# Altium PCB PCB1.PcbDoc (part 1 of 2)
Units mm, origin at the board's own origin, x right, y up, seen from the top; angles counter-clockwise.
Board outline 50 x 65 mm, 2 copper layers (Top Layer, Bottom Layer), stack 1.671 mm thick; 71 components, 49 nets, 263 pads, 156 vias.
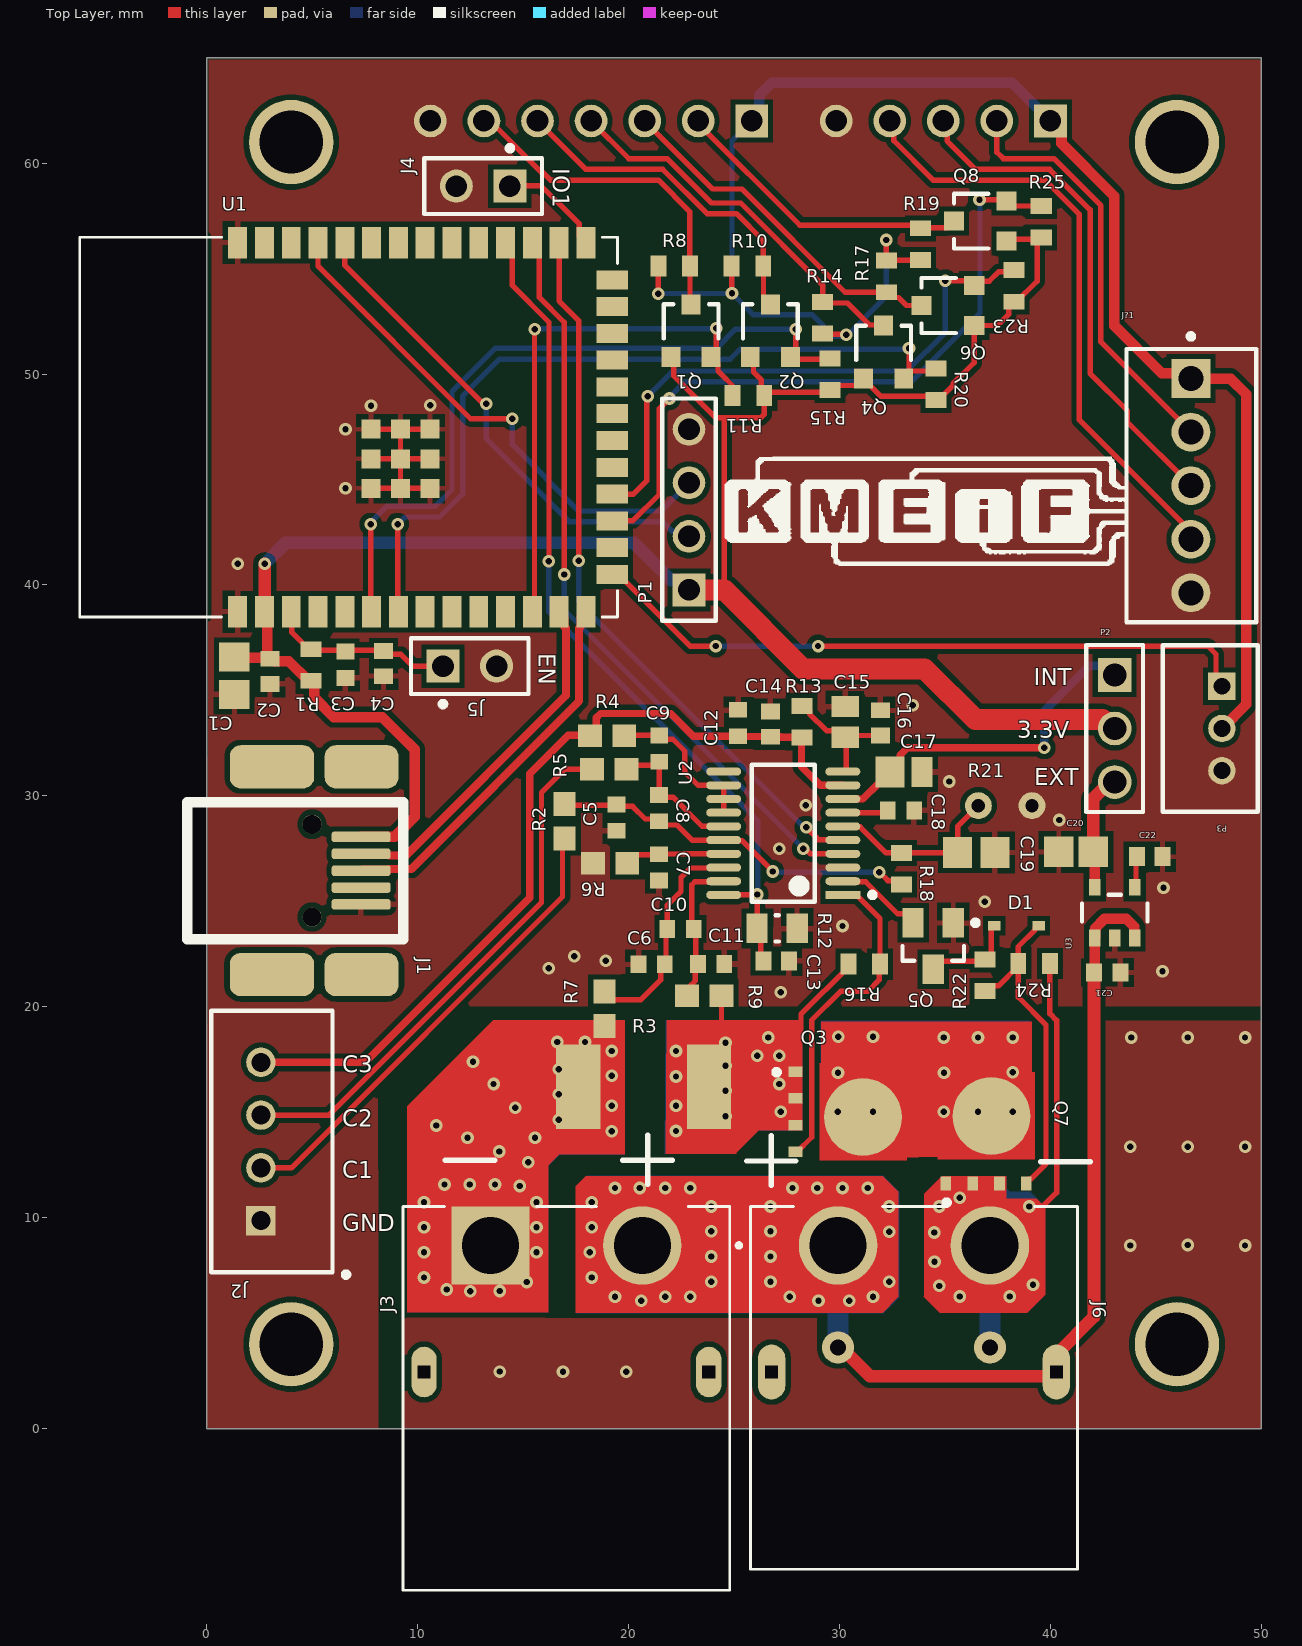
[diagram p0: Top Layer view]
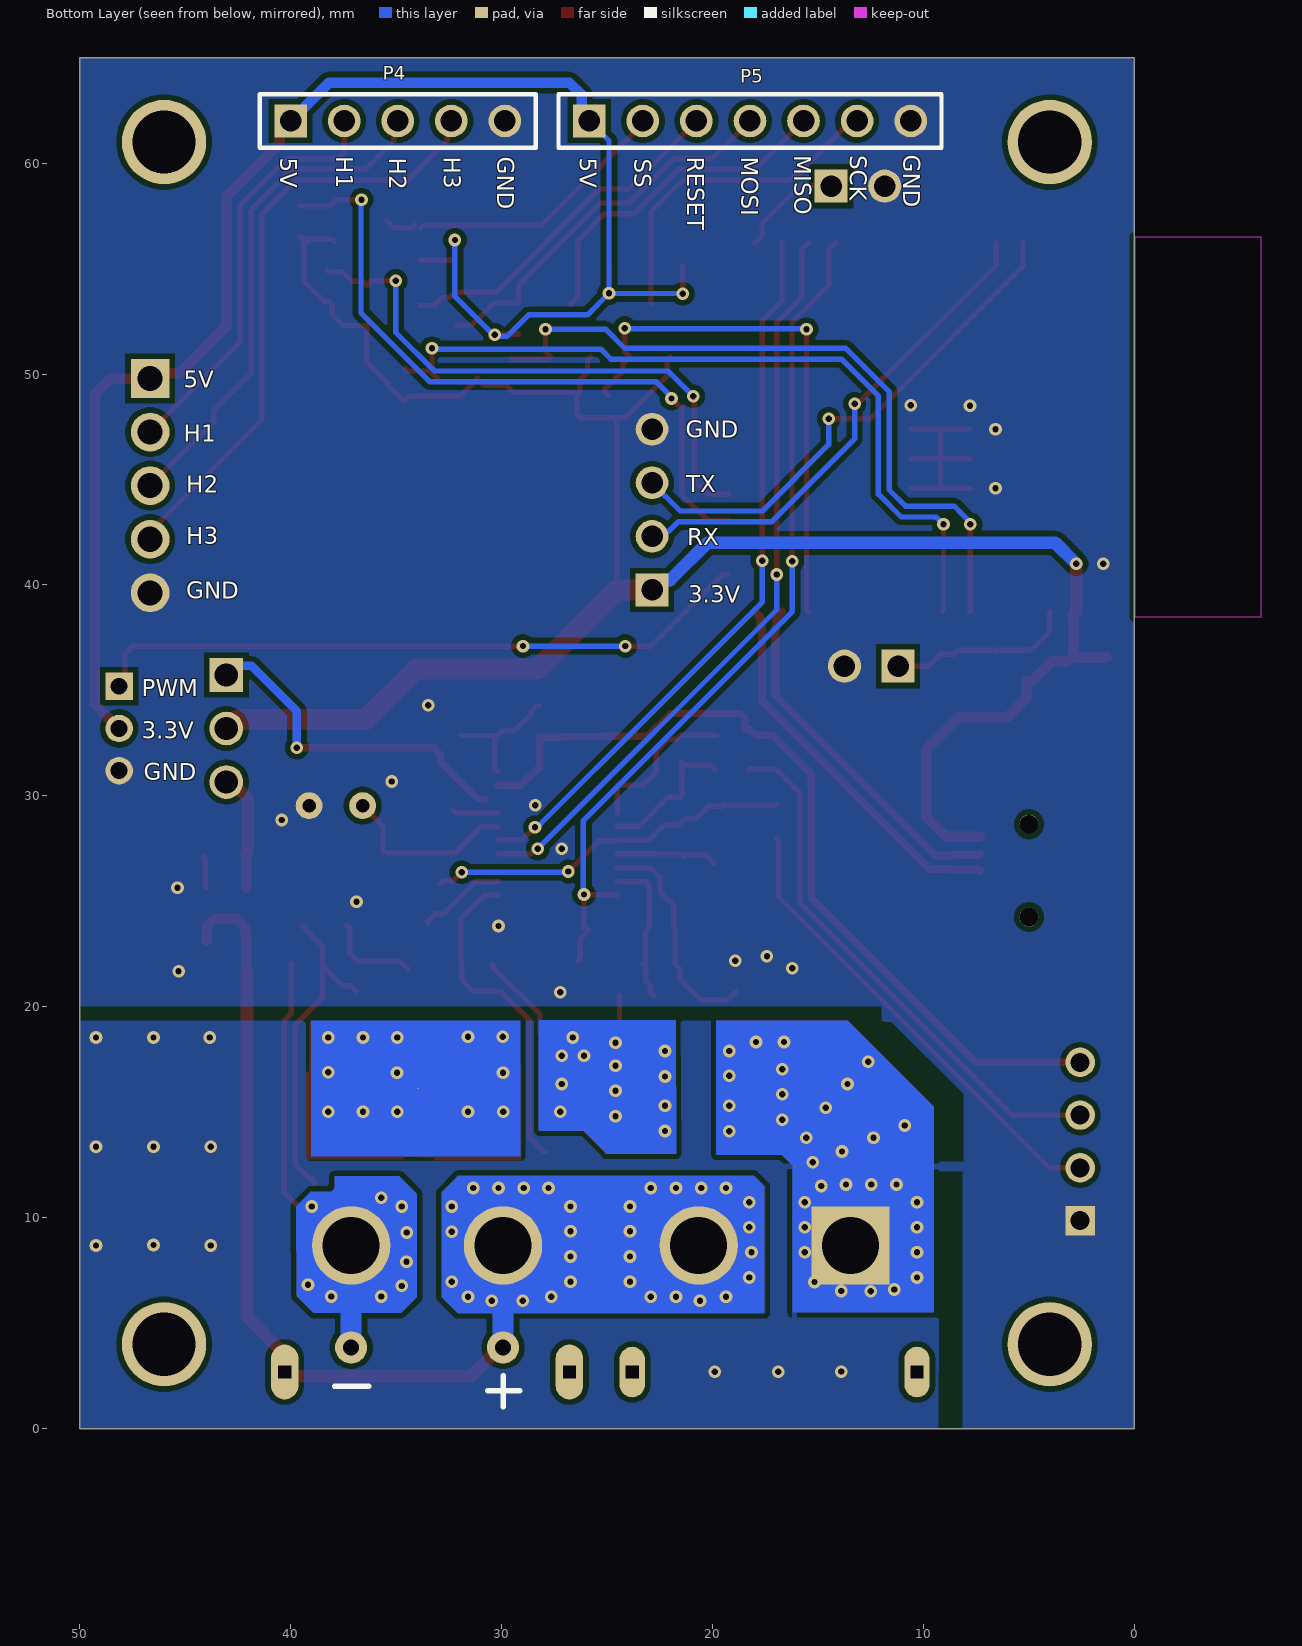
[diagram p1: Bottom Layer view, seen from below]
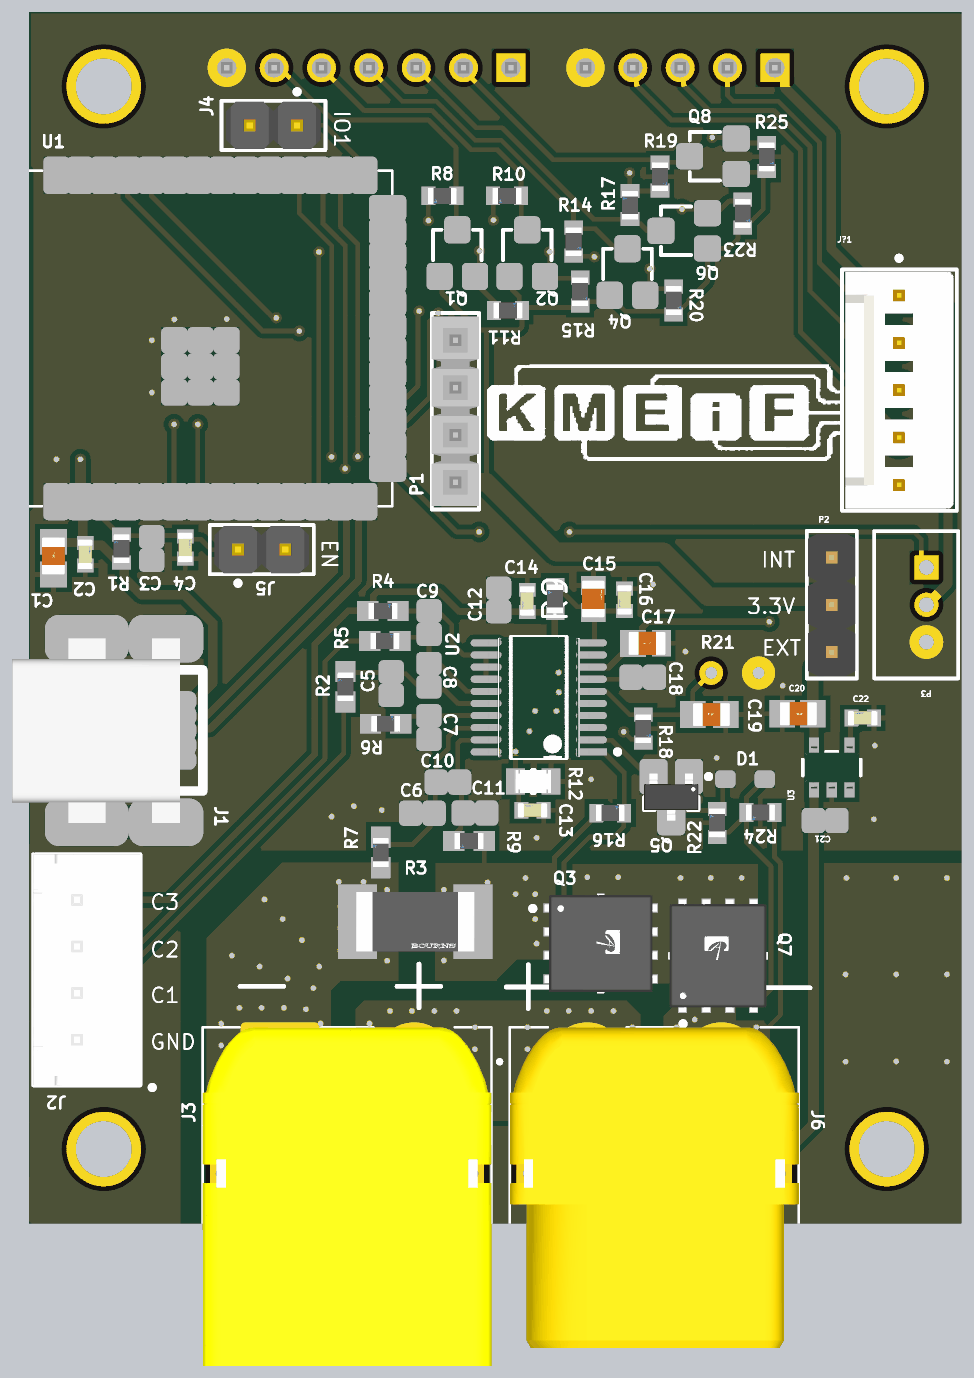
[diagram p2: 3D render of the assembled board from above, using the file's embedded part models]

## Layer stack, top to bottom
Top Solder: solder mask 0.0254, SM-001, Dk 4
Top Layer: signal copper 0.0356
Dielectric1: prepreg 1.6, FR-4, Dk 4.8
Bottom Layer: signal copper 0.0356
Bottom Solder: solder mask 0.0254, SM-001, Dk 4

## Board outline
0,0 50,0 50,65 0,65

## Design rules (kind name [scope] priority, off if disabled: settings)
Clearance Clearance_3 [All] p1: gap=0.254 ignorepadtopadclearanceinfootprint=FALSE except(0: Arc-Hole Track-Hole SMDPad-Hole THPad-Hole Via-Hole Fill-Hole Poly-Hole Region-Hole Text-Hole)
Clearance Clearance_2 [All] p2: gap=0.254 ignorepadtopadclearanceinfootprint=FALSE except(0: Arc-Hole Track-Hole SMDPad-Hole THPad-Hole Via-Hole Fill-Hole Poly-Hole Region-Hole Text-Hole)
Clearance Clearance_1 [All] p3: gap=0.254 ignorepadtopadclearanceinfootprint=FALSE except(0: Arc-Hole Track-Hole SMDPad-Hole THPad-Hole Via-Hole Fill-Hole Poly-Hole Region-Hole Text-Hole)
Clearance [All] p4: gap=0.254 ignorepadtopadclearanceinfootprint=FALSE
DiffPairsRouting DiffPair_diffDiffPairsRouting [InDifferentialPairClass('diff')] p1: maxlimit=0.254 minlimit=0.254 mostfreqgap=0.254 toplayer_minwidth=0.381 toplayer_maxwidth=0.381 toplayer_prefwidth=0.381 bottomlayer_minwidth=0.381 bottomlayer_maxwidth=0.381 bottomlayer_prefwidth=0.381 maxuncoupledlength=12.7
DiffPairsRouting DiffPair_DiffPairsRouting [InDifferentialPairClass('diff')] p2: maxlimit=0.254 minlimit=0.254 mostfreqgap=0.254 toplayer_minwidth=0.381 toplayer_maxwidth=0.381 toplayer_prefwidth=0.381 bottomlayer_minwidth=0.381 bottomlayer_maxwidth=0.381 bottomlayer_prefwidth=0.381 maxuncoupledlength=12.7
DiffPairsRouting DiffPair_DiffPairsRouting [InDifferentialPairClass('diff')] p3: maxlimit=0.254 minlimit=0.254 mostfreqgap=0.254 toplayer_minwidth=0.381 toplayer_maxwidth=0.381 toplayer_prefwidth=0.381 bottomlayer_minwidth=0.381 bottomlayer_maxwidth=0.381 bottomlayer_prefwidth=0.381 maxuncoupledlength=12.7
DiffPairsRouting [All] p4: maxlimit=0.254 minlimit=0.254 mostfreqgap=0.254 toplayer_minwidth=0.254 toplayer_maxwidth=0.254 toplayer_prefwidth=0.254 bottomlayer_minwidth=0.254 bottomlayer_maxwidth=0.254 bottomlayer_prefwidth=0.254 maxuncoupledlength=12.7
HoleSize [All] p1: absolutevalues=TRUE maxlimit=7.62 minlimit=0.254 maxpercent=80.000 minpercent=20.000
MatchedLengths DiffPair_diffMatchedLengths [InDifferentialPairClass('diff')] p1: tolerance=0.254 checknetsindiffpair=TRUE checkdiffpairvsdiffpair=FALSE checkxsignals=FALSE checkothers=FALSE
MinimumAnnularRing [All] p1: minimumring=0.127
PasteMaskExpansion [All] p1: expansion=0.254
PlaneClearance PlaneClearance_1 [InNet('NetQ1_5-6-7-8')] p1: clearance=0
PlaneClearance [All] p2: clearance=0.381
PolygonConnect PolygonConnect_6 [InNet('GND') vs HasFootprint('FP-CRCW0603-e3-IPC_A')] p1: connectstyle=Direct reliefconductorwidth=0.254 reliefentries=4 polygonreliefangle="90 Angle" airgapwidth=0.254
PolygonConnect PolygonConnect_5 [InNet('GND') vs HasFootprint('FP-CRE2512-R005-R009-MFG')] p2: connectstyle=Direct reliefconductorwidth=0.254 reliefentries=4 polygonreliefangle="90 Angle" airgapwidth=0.254
PolygonConnect PolygonConnect_4 [InNet('GND')] p3: thpad.connectstyle=Direct thpad.reliefconductorwidth=0.254 thpad.reliefentries=4 thpad.polygonreliefangle="90 Angle" thpad.airgapwidth=0.254 smdpad.connectstyle=Relief smdpad.reliefconductorwidth=0.254 smdpad.reliefentries=4 smdpad.polygonreliefangle="90 Angle" smdpad.airgapwidth=0.254 via.connectstyle=Direct via.reliefconductorwidth=0.254 via.reliefentries=4 via.polygonreliefangle="90 Angle" via.airgapwidth=0.254
PolygonConnect PolygonConnect_3 [InNet('GND') vs HasFootprint('FP-CRE2512-R005-R009-MFG')] p4: connectstyle=Direct reliefconductorwidth=0.254 reliefentries=4 polygonreliefangle="90 Angle" airgapwidth=0.254
PolygonConnect PolygonConnect_2 [InNet('GND') vs HasFootprint('FP-B4B-XH-A_LF_SN-MFG')] p5: connectstyle=Direct reliefconductorwidth=0.254 reliefentries=4 polygonreliefangle="90 Angle" airgapwidth=0.254
PolygonConnect PolygonConnect_1 [InNet('GND')] p6: thpad.connectstyle=Relief thpad.reliefconductorwidth=0.254 thpad.reliefentries=4 thpad.polygonreliefangle="90 Angle" thpad.airgapwidth=0.254 smdpad.connectstyle=Relief smdpad.reliefconductorwidth=0.254 smdpad.reliefentries=4 smdpad.polygonreliefangle="90 Angle" smdpad.airgapwidth=0.254 via.connectstyle=Direct via.reliefconductorwidth=0.254 via.reliefentries=4 via.polygonreliefangle="90 Angle" via.airgapwidth=0.254
PolygonConnect [InNet('NetQ1_5-6-7-8') vs InNet('NetQ1_5-6-7-8')] p7: connectstyle=Direct reliefconductorwidth=0.254 reliefentries=4 polygonreliefangle="90 Angle" airgapwidth=0.254
RoutingVias [All] p1: holewidth=0.3 width=0.6 viastyle="Through Hole" minholewidth=0.254 minwidth=0.508 maxholewidth=0.508 maxwidth=1.016
SMDNeckDown [All] p1: percent=100.000
SilkToSolderMaskClearance SilkscreenOverComponentPads [IsPad] p1: minsilkscreentomaskgap=0.254 clearancetoexposedcopper=TRUE
SolderMaskExpansion [All] p1: expansion=0.254 istentingtop=FALSE
Width [All] p1: maxlimit=5 minlimit=0.254 preferedwidth=0.254 minimp=50.000000 maximp=50.000000 favimp=50.000000
25 further rules are at their usual default settings.

## Classes and differential pairs
differential pair class diff: D
differential pair D: +D_P -D_N

## Components (designator, comment, footprint, x,y, rotation, side; value= is the part's Value field where it differs from the comment)
C1 "4.7µF" FP-C2012-125-0_2-IPC_B#1 1.303,35.815 r270 top (schematic designator C16)
C2 "100nF" FP-C0603C-CF-MFG 3.006,35.903 r270 top value="0.10 μF" (schematic designator C15)
C3 "1µF" CAPC1608X90X35LL10T15 6.569,36.213 r270 top (schematic designator C19)
C4 "100nF" FP-C0603C-CF-MFG 8.372,36.27 r270 top value="0.10 μF" (schematic designator C18)
C5 "1µF" CAPC1608X90X35LL10T15 19.419,28.971 r90 top (schematic designator C4)
C6 "1µF" CAPC1608X90X35LL10T15 21.091,22.016 r180 top (schematic designator C8)
C7 "1µF" CAPC1608X90X35LL10T15 21.444,26.611 r270 top
C8 "1µF" CAPC1608X90X35LL10T15 21.445,29.421 r90 top (schematic designator C2)
C9 "1µF" CAPC1608X90X35LL10T15 21.452,32.243 r90 top (schematic designator C1)
C10 "1µF" CAPC1608X90X35LL10T15 22.461,23.683 r180 top (schematic designator C9)
C11 "1µF" CAPC1608X90X35LL10T15 23.911,22.027 r180 top (schematic designator C12)
C12 "1µF" CAPC1608X90X35LL10T15 25.182,33.455 r90 top (schematic designator C3)
C13 "470pF" FP-C0603C-CF-MFG 26.999,22.175 r0 top value="470 pF" (schematic designator C6)
C14 "100nF" FP-C0603C-CF-MFG 26.717,33.402 r90 top value="0.10 μF" (schematic designator C13)
C15 "10µF" FP-GRM21B-0_15-IPC_C 30.265,33.508 r90 top (schematic designator C10)
C16 "100nF" FP-C0603C-CF-MFG 31.938,33.461 r90 top value="0.10 μF" (schematic designator C14)
C17 "4.7µF" FP-C2012-125-0_2-IPC_B#2 33.149,31.128 r0 top (schematic designator C11)
C18 "1µF" CAPC1608X90X35LL10T15 32.914,29.311 r0 top (schematic designator C5)
C19 "4.7µF" FP-C2012-125-0_2-IPC_B#3 36.6,27.313 r0 top (schematic designator C17)
C20 "4.7µF" FP-C2012-125-0_2-IPC_B#4 41.266,27.348 r180 top (schematic designator C22)
C21 "1µF" CAPC1608X90X35LL10T15 42.692,21.623 r0 top (schematic designator C20)
C22 "100nF" FP-C0603C-CF-MFG 44.712,27.117 r0 top value="0.10 μF" (schematic designator C21)
D1 "1N4148WS-7-F" DIOD-SOD323-2-A_V 38.399,23.841 r0 top
J1 "67503-1020" MOLX-67503-1020_V 7.316,28.054 r0 top (schematic designator J5)
J2 "Battery Pack" FP-B4B-XH-A_LF_SN-MFG 3.091,13.615 r270 top (schematic designator J1)
J3 "XT60PW-M" AMASS_XT60PW-M 17.052,2.684 r180 top (schematic designator J4)
J4 "M20-9990245" FP-M20-9990245-MFG 13.101,58.911 r180 top (schematic designator J6)
J5 "M20-9990245" FP-M20-9990245-MFG 12.469,36.152 r0 top (schematic designator J2)
J6 "XT60PW-F" AMASS_XT60PW-F 33.531,8.684 r0 top (schematic designator J3)
J?1 "22-29-2051" FP-22-29-2051-MFG 46.679,44.709 r90 top (schematic designator J?)
P1 "TSW-104-08-G-S" SMTC-TSW-104-08-X-S 22.863,39.764 r90 top (schematic designator P5)
P2 "61300311121" 61300311121 43.048,33.196 r270 top (schematic designator P4)
P3 "B3B-PH-K-S(LF)(SN)" JST-B3B-PH-K-S-3_V 47.579,33.196 r270 top (schematic designator P6)
P4 "TSW-105-05-F-S" SMTC-TSW-105-05-X-S 40,62 r180 bottom (schematic designator P1)
P5 "TSW-107-05-T-S" SMTC-TSW-107-05-X-S 25.84,62 r180 bottom (schematic designator P2)
Q1 "2N7002" STM-SOT-23-3_V 22.967,52.058 r0 top (schematic designator Q6)
Q2 "2N7002" STM-SOT-23-3_V 26.717,52.058 r0 top (schematic designator Q4)
Q3 "AON6362" FP-DFN5x6_8L_EP1_P-MFG#1 30.663,15.025 r270 top (schematic designator Q1)
Q4 "2N7002" STM-SOT-23-3_V 32.095,51.046 r0 top (schematic designator Q5)
Q5 "FDN338P" FAIR-SSOT3L-3_V 34.442,22.881 r270 top (schematic designator Q2)
Q6 "2N7002" STM-SOT-23-3_V 35.138,53.254 r90 top (schematic designator Q8)
Q7 "AON6362" FP-DFN5x6_8L_EP1_P-MFG#2 36.949,14.369 r0 top (schematic designator Q3)
Q8 "2N7002" STM-SOT-23-3_V 36.677,57.254 r90 top (schematic designator Q7)
R1 "10kΩ" FP-CRCW0603-e3-MFG 4.949,36.205 r90 top (schematic designator R25)
R2 "100Ω" FP-CRCW0603-e3-IPC_A 16.961,28.8 r90 top (schematic designator R3)
R3 "5mΩ" FP-CRE2512-R005-R009-MFG 20.709,16.202 r0 top (schematic designator R5)
R4 "100Ω" FP-CRCW0603-e3-IPC_A 18.976,32.86 r0 top (schematic designator R1)
R5 "100Ω" FP-CRCW0603-e3-IPC_A 19.081,31.257 r0 top (schematic designator R2)
R6 "100Ω" FP-CRCW0603-e3-IPC_A 19.12,26.813 r0 top (schematic designator R4)
R7 "100Ω" FP-CRCW0603-e3-IPC_A 18.857,19.907 r90 top (schematic designator R8)
R8 "10kΩ" FP-CRCW0603-e3-MFG 22.162,55.13 r180 top (schematic designator R22)
R9 "100Ω" FP-CRCW0603-e3-IPC_A 23.592,20.521 r180 top (schematic designator R11)
R10 "10kΩ" FP-CRCW0603-e3-MFG 25.632,55.13 r180 top (schematic designator R24)
R11 "10kΩ" FP-CRCW0603-e3-MFG 25.681,48.983 r0 top (schematic designator R17)
R12 "510kΩ" FP-CRCW0805-e3-IPC_B 27.041,23.72 r180 top (schematic designator R6)
R13 "1kΩ" FP-CRCW0603-e3-MFG 28.214,33.514 r90 top (schematic designator R9)
R14 "10kΩ" FP-CRCW0603-e3-MFG 29.202,52.671 r270 top (schematic designator R23)
R15 "10kΩ" FP-CRCW0603-e3-MFG 29.552,49.991 r270 top
R16 "1MΩ" FP-CRCW0603-e3-MFG 31.169,22.019 r0 top (schematic designator R10)
R17 "10kΩ" FP-CRCW0603-e3-MFG 32.229,54.63 r90 top (schematic designator R20)
R18 "10kΩ" FP-CRCW0603-e3-MFG 32.94,26.549 r270 top (schematic designator R7)
R19 "10kΩ" FP-CRCW0603-e3-MFG 33.839,56.16 r270 top (schematic designator R21)
R20 "10kΩ" FP-CRCW0603-e3-MFG 34.571,49.516 r270 top (schematic designator R16)
R21 "10k" ThermistorTHT 39.125,29.538 r180 top (schematic designator R12)
R22 "1MΩ" FP-CRCW0603-e3-MFG 36.902,21.497 r90 top (schematic designator R13)
R23 "10kΩ" FP-CRCW0603-e3-MFG 38.275,54.181 r270 top (schematic designator R19)
R24 "1MΩ" FP-CRCW0603-e3-MFG 39.224,22.055 r180 top (schematic designator R14)
R25 "10kΩ" FP-CRCW0603-e3-MFG 39.565,57.219 r270 top (schematic designator R18)
U1 "ESP32-S3-WROOM-1-N16R2" XCVR_ESP32-S3-WROOM-1-N16R2 6.724,47.484 r90 top (schematic designator U2)
U2 "BQ7692006PWR" FP-PW0020A-IPC_B 27.333,28.228 r180 top (schematic designator U1)
U3 "AP2202K-3.3TRG1" FP-SOT25-MFG 43.048,24.466 r90 top

## Footprints (in the part's own frame and the unit in brackets; to place one, negate y for a bottom-side part, rotate by r counter-clockwise, add the part's x,y. Pads: shape width x height; smd on the part's side, far side on the other; paste and mask are expansions set on the pad)
61300311121 [mm] "Pin Header, pitch 2.54 mm, THT, Vertical, single row, 3p"
  rect 1.6x1.6 hole 1.1: 1(-2.54,0)
  round 1.6 hole 1.1: 2(0,0) 3(2.54,0)
  silkscreen extent -3.96,-1.35 3.96,1.35, body extent -3.81,-1.27 3.81,1.27, height 8.57
AMASS_XT60PW-F [mm]
  round 3.716 hole 2.7: 1(-3.6,0) 2(3.6,0)
  oval 1.3x2.6 hole 0.6 square: S1(-6.75,-6) S2(6.75,-6)
  silkscreen extent -8.4,-15.35 7.75,1.85, body extent -7.75,-15.35 7.75,1.85, height 8.4
AMASS_XT60PW-M [mm]
  rect 3.716x3.716 / inner round 3.716 / far side rect 3.716x3.716 hole 2.7: 1(3.6,-6)
  round 3.716 hole 2.7: 2(-3.6,-6)
  oval 1.2x2.4 hole 0.6 square: S1(6.75,0) S2(-6.75,0)
  silkscreen extent -7.75,-7.85 7.75,10.35, body extent -7.75,-7.85 7.75,10.35, height 8.4
CAPC1608X90X35LL10T15 [mm] "Chip Capacitor, 2-Leads, Body 1.60x0.80mm, IPC High Density"
  rect 0.75x0.85 smd: 1(-0.625,0) 2(0.625,0)
  body extent -0.85,-0.45 0.85,0.45, height 0.9
DIOD-SOD323-2-A_V [mm] "SOD-323, 2-Leads, Body 1.7x1.3mm"
  rect 0.59x0.45 smd: 1(-1.055,0) 2(1.055,0)
  body extent -0.85,-0.65 0.85,0.65, height 1.2
FAIR-SSOT3L-3_V [mm] "SOT23, 3-Leads, Body 2.92x1.4mm, Pitch 0.95mm"
  rect 1.4x1 smd: 1(-1.1,0.95) 2(-1.1,-0.95) 3(1.1,0)
  silkscreen extent -1.22,-1.46 0.7,2.13, body extent -1.26,-1.46 1.26,1.46, height 1.12
FP-22-29-2051-MFG [mm]
  rect 1.84x1.84 hole 1.19 paste-1000 mask+0: 1(5.08,0.02)
  round 1.84 hole 1.19 paste-1000 mask+0: 2(2.54,0.02) 3(0,0.02) 4(-2.54,0.02) 5(-5.08,0.02)
  silkscreen extent -6.48,-3.08 7.2,3.08, body extent -6.58,-3.18 6.58,3.18, height 0.25
FP-B4B-XH-A_LF_SN-MFG [mm]
  rect 1.4x1.4 hole 0.9 paste+0 mask+0: 1(3.75,-0.525)
  round 1.4 hole 0.9 paste-1000 mask+0: 2(1.25,-0.525) 3(-1.25,-0.525) 4(-3.75,-0.525)
  silkscreen extent -6.2,-2.87 6.44,3.64, body extent -6.3,-2.98 6.3,2.98, height 0.25
FP-C0603C-CF-MFG [mm]
  rect 0.75x0.9 smd paste+0 mask+0: 1(-0.6,0) 2(0.6,0)
  body extent -1.2,-0.6 1.2,0.6, height 0.25
FP-C2012-125-0_2-IPC_B#1 [mm]
  rect 1.378x1.456 smd paste+0 mask+0: 1(-0.764,0) 2(1,0)
  body extent -1.7,-0.98 1.7,0.98, height 0.25
FP-C2012-125-0_2-IPC_B#2 [mm]
  rect 1.378x1.456 smd paste+0 mask+0: 1(-0.764,0)
  rect 1.007x1.408 smd paste+0 mask+0: 2(0.764,0)
  body extent -1.7,-0.98 1.7,0.98, height 0.25
FP-C2012-125-0_2-IPC_B#3 [mm]
  rect 1.378x1.456 smd paste+0 mask+0: 1(-1,0) 2(0.764,0)
  body extent -1.7,-0.98 1.7,0.98, height 0.25
FP-C2012-125-0_2-IPC_B#4 [mm]
  rect 1.378x1.456 smd paste+0 mask+0: 1(-0.764,0) 2(0.872,0)
  body extent -1.7,-0.98 1.7,0.98, height 0.25
FP-CRCW0603-e3-IPC_A [mm]
  rect 1.135x1.062 smd paste+0 mask+0: 1(-0.815,0) 2(0.815,0)
  body extent -1.88,-1.03 1.88,1.03, height 0.25
FP-CRCW0603-e3-MFG [mm]
  rect 0.75x1 smd paste+0 mask+0: 1(-0.75,0) 2(0.75,0)
  body extent -1.22,-0.6 1.22,0.6, height 0.25
FP-CRCW0805-e3-IPC_B [mm]
  rect 1.007x1.408 smd paste+0 mask+0: 1(-0.951,0) 2(0.951,0)
  silkscreen extent -0.07,-0.62 0.07,0.63, body extent -1.7,-0.95 1.7,0.95, height 0.25
FP-CRE2512-R005-R009-MFG [mm]
  rect 2.1x4 smd paste+0 mask+0: 1(-3.1,0) 2(3.1,0)
  body extent -4.25,-2.1 4.25,2.1, height 0.25
FP-DFN5x6_8L_EP1_P-MFG#1 [mm]
  rect 0.5x0.65 smd paste+0 mask+0: 1(-1.905,-2.75) 2(-0.635,-2.75) 3(0.635,-2.75) 4(1.905,-2.75)
  round 3.687 smd paste+0 mask+0: 5-6-7-8(0.252,0.448)
  Top Layer region: -2.3,-1.6 2.3,-1.6 2.3,2.52 2.155,2.52 2.155,3.07 1.655,3.07 1.655,2.52 0.885,2.52 0.885,3.07 0.385,3.07 0.385,2.52 -0.385,2.52 -0.385,3.07 -0.885,3.07 -0.885,2.52 -1.655,2.52 -1.655,3.07 -2.155,3.07 -2.155,2.52 -2.3,2.52 -2.3,-1.6
  silkscreen extent -2,-3.77 -1.75,-3.52, body extent -2.9,-3.18 2.9,3.18, height 0.25
FP-DFN5x6_8L_EP1_P-MFG#2 [mm]
  rect 0.5x0.65 smd paste+0 mask+0: 1(-1.905,-2.75) 2(-0.635,-2.75) 3(0.635,-2.75) 4(1.905,-2.75)
  round 3.687 smd paste-2539.97 mask+0: 5-6-7-8(0.252,0.448)
  Top Layer region: -2.3,-1.6 2.3,-1.6 2.3,2.52 2.155,2.52 2.155,3.07 1.655,3.07 1.655,2.52 0.885,2.52 0.885,3.07 0.385,3.07 0.385,2.52 -0.385,2.52 -0.385,3.07 -0.885,3.07 -0.885,2.52 -1.655,2.52 -1.655,3.07 -2.155,3.07 -2.155,2.52 -2.3,2.52 -2.3,-1.6
  silkscreen extent -2,-3.77 -1.75,-3.53, body extent -2.9,-3.17 2.9,3.17, height 0.25
FP-GRM21B-0_15-IPC_C [mm]
  rect 1.006x1.308 smd paste+0 mask+0: 1(-0.726,0) 2(0.726,0)
  body extent -1.33,-0.8 1.33,0.8, height 0.25
FP-M20-9990245-MFG [mm]
  rect 1.57x1.57 hole 1.02 paste-1000 mask+0: 1(-1.27,0)
  round 1.57 hole 1.02 paste-1000 mask+0: 2(1.27,0)
  silkscreen extent -2.79,-1.92 2.79,1.32, body extent -2.89,-1.42 2.89,1.42, height 0.25
FP-PW0020A-IPC_B [mm]
  rect 1.655x0.381 smd paste+0 mask+0: 1(-2.825,2.925)
  rrect100% 1.655x0.381 smd paste+0 mask+0: 2(-2.825,2.275) 3(-2.825,1.625) 4(-2.825,0.975) 5(-2.825,0.325) 6(-2.825,-0.325) 7(-2.825,-0.975) 8(-2.825,-1.625) 9(-2.825,-2.275) 10(-2.825,-2.925) 11(2.825,-2.925) 12(2.825,-2.275) 13(2.825,-1.625) 14(2.825,-0.975) 15(2.825,-0.325) 16(2.825,0.325) 17(2.825,0.975) 18(2.825,1.625) 19(2.825,2.275) 20(2.825,2.925)
  silkscreen extent -4.35,-3.25 1.5,3.25, body extent -3.9,-3.5 3.9,3.5, height 0.25
FP-SOT25-MFG [mm]
  rect 0.8x0.55 smd paste+0 mask+0: 1(-1.2,0.95) 2(-1.2,0) 3(-1.2,-0.95) 4(1.2,-0.95) 5(1.2,0.95)
  silkscreen extent -0.43,-1.55 0.85,1.55, body extent -1.7,-1.65 1.7,1.65, height 0.25
JST-B3B-PH-K-S-3_V [mm] "Connector, 3-Leads, Body 7.9x4.5mm, Pitch 2mm"
  rect 1.3x1.3 hole 0.8: 1(-2,0.55)
  round 1.3 hole 0.8: 2(0,0.55) 3(2,0.55)
  silkscreen extent -3.95,-2.25 3.95,2.25, body extent -3.95,-2.25 3.95,2.25, height 6
MOLX-67503-1020_V [mm] "Mini USB Connector, SMT, Righer Angle"
  rrect50% 2.8x0.5 smd: 1(0,0) 2(0,-0.8) 3(0,-1.6) 4(0,-2.4) 5(0,-3.2)
  rrect50% 3.5x2.05 smd: 6(0.025,3.325) 8(0.025,-6.525)
  rrect50% 4x2.05 smd: 7(-4.225,3.325) 9(-4.225,-6.525)
  round 0.9 hole 0.9 unplated: X(-2.325,-3.8) Y(-2.325,0.6)
  silkscreen extent -8.25,-4.85 2,1.65, body extent -8.22,-6.56 0.78,3.34, height 3.95
SMTC-TSW-104-08-X-S [mm] ".025 SQ Post Terminal Strip Assembly, 1x4 Pins, Vertical, 2.54mm Pitch, Male"
  rect 1.55x1.55 hole 1.02: 1(0,0)
  round 1.55 hole 1.02: 2(2.54,0) 3(5.08,0) 4(7.62,0)
  silkscreen extent -1.46,-1.27 9.08,1.27, body extent -1.27,-1.27 8.89,1.27, height 8.38
SMTC-TSW-105-05-X-S [mm] ".025 SQ Post Terminal Strip Assembly, 1x5 Pins, Vertical, 2.54mm Pitch, Male"
  rect 1.55x1.55 hole 1.02: 1(0,0)
  round 1.55 hole 1.02: 2(2.54,0) 3(5.08,0) 4(7.62,0) 5(10.16,0)
  silkscreen extent -1.46,-1.27 11.62,1.27, body extent -1.27,-1.27 11.43,1.27, height 5.21
SMTC-TSW-107-05-X-S [mm] ".025 SQ Post Terminal Strip Assembly, 1x7 Pins, Vertical, 2.54mm Pitch, Male"
  rect 1.55x1.55 hole 1.02: 1(0,0)
  round 1.55 hole 1.02: 2(2.54,0) 3(5.08,0) 4(7.62,0) 5(10.16,0) 6(12.7,0) 7(15.24,0)
  silkscreen extent -1.46,-1.27 16.7,1.27, body extent -1.27,-1.27 16.51,1.27, height 5.21
STM-SOT-23-3_V [mm] "SOT23, 3-Leads, Body 3.016x2.8mm, Pitch 0.95mm"
  rect 0.9x0.95 smd: 1(-0.95,-1.25) 2(0.95,-1.25) 3(0,1.25)
  silkscreen extent -1.3,-0.38 1.3,1.25, body extent -1.14,-1.25 1.17,1.36, height 1.25
ThermistorTHT [mm]
  round 1.27 hole 0.635: 1(0,0) 2(2.54,0)
XCVR_ESP32-S3-WROOM-1-N16R2 [mm]
  rect 1.5x0.9 smd: 1(-8.75,5.26) 2(-8.75,3.99) 3(-8.75,2.72) 4(-8.75,1.45) 5(-8.75,0.18) 6(-8.75,-1.09) 7(-8.75,-2.36) 8(-8.75,-3.63) 9(-8.75,-4.9) 10(-8.75,-6.17) 11(-8.75,-7.44) 12(-8.75,-8.71) 13(-8.75,-9.98) 14(-8.75,-11.25) 27(8.75,-11.25) 28(8.75,-9.98) 29(8.75,-8.71) 30(8.75,-7.44) 31(8.75,-6.17) 32(8.75,-4.9) 33(8.75,-3.63) 34(8.75,-2.36) 35(8.75,-1.09) 36(8.75,0.18) 37(8.75,1.45) 38(8.75,2.72) 39(8.75,3.99) 40(8.75,5.26)
  rect 0.9x1.5 smd: 15(-6.985,-12.5) 16(-5.715,-12.5) 17(-4.445,-12.5) 18(-3.175,-12.5) 19(-1.905,-12.5) 20(-0.635,-12.5) 21(0.635,-12.5) 22(1.905,-12.5) 23(3.175,-12.5) 24(4.445,-12.5) 25(5.715,-12.5) 26(6.985,-12.5)
  rect 0.9x0.9 smd: 41_1(-1.5,-2.46) 41_2(-2.9,-2.46) 41_3(-0.1,-2.46) 41_4(-2.9,-3.86) 41_5(-1.5,-3.86) 41_6(-0.1,-3.86) 41_7(-2.9,-1.06) 41_8(-1.5,-1.06) 41_9(-0.1,-1.06)
  Keep-Out Layer region: 9,6.75 -9,6.75 -9,12.75 9,12.75
  Keep-Out Layer region: 9,6.75 -9,6.75 -9,12.75 9,12.75
  silkscreen extent -9,-12.75 9,12.75

## Part data
C1 C17 C19 C20: library part CMP-08246-000007-2, "Multilayer Ceramic Capacitors 4.7μF ±10% 50V X5R SMD 0805", Capacitance=4.7uF, Case Code (Imperial)=0805, Case Code (Metric)=2012, Dielectric=X5R, Dielectric Material=Ceramic, Max Operating Temperature=85°C, Min Operating Temperature=-55°C, Package Quantity=1, Tolerance=10%, Voltage=50V, Case/Package=0805, Construction=Flat, Depth=1.25mm, Height=1.25mm, Lead Free="Lead Free", Length=2mm, Mount="Surface Mount", Packaging="Tape and Reel", Radiation Hardening=No, REACH SVHC="No SVHC", Resistor Type=Ceramic, Series=C, Termination=SMD/SMT, Thickness=0.057inch, Voltage Rating=50V, Voltage Rating (DC)=50V, Weight=0.000194oz, Width=0.049inch
C2 C4 C14 C16 C22: library part CMP-2006-03061-2, "CAP CER 0.1UF 50V X7R 0603", Capacitance="0.10 μF", Manufacturer=KEMET, Manufacturer Part Number=C0603C104K5RACTU, Package=C0603C-CF, Temperature="-55°C to +125°C", Temperature Characteristic=X7R, Temperature Coefficient=30ppm/°C, Temperature Range High=+125°C, Temperature Range Low=-55°C, Tolerance=0.1, Voltage Rating="50 V", Automotive=Yes, Automotive Grade="Grade 1", Category=Cap, ComponentLink2Description=Datasheet, ComponentLink2URL=https://api.kemet.com/component-edge/download/datasheet/C0603C100J5GACAUTO.pdf, Device Class L1="Passive Components", Device Class L2=Capacitors, Device Class L3="Ceramic Capacitors", Digikey Description="CAP CER 0.1UF 50V X7R 0603", Height=0.87mm, Lead Free=Yes, Material=Ceramic, Octopart=https://octopart.com/c0603c104k5ractu-kemet-139244, RoHS=TRUE
C3 C5 C6 C7 C8 C9 C10 C11 C12 C18 C21: library part CMP-2006-02459-1, Manufacturer=Murata, Part Number=GRM188R61E105KA12D
C13: library part CMP-2006-03816-2, "CAP CER 470PF 50V X7R 0603", Capacitance="470 pF", Manufacturer=KEMET, Manufacturer Part Number=C0603C471K5RACTU, Package=C0603C-CF, Temperature="-55°C to +125°C", Temperature Characteristic=X7R, Temperature Coefficient=30ppm/°C, Temperature Range High=+125°C, Temperature Range Low=-55°C, Tolerance=0.1, Voltage Rating="50 V", Automotive=Yes, Automotive Grade="Grade 1", Category=Cap, ComponentLink2Description=Datasheet, ComponentLink2URL=https://api.kemet.com/component-edge/download/datasheet/C0603C100J5GACAUTO.pdf, Device Class L1="Passive Components", Device Class L2=Capacitors, Device Class L3="Ceramic Capacitors", Digikey Description="CAP CER 470PF 50V X7R 0603", Height=0.87mm, Lead Free=Yes, Material=Ceramic, Mouser Description="Ceramic Capacitor, 470Pf, 50V, X7R, 10%, 0603, Full Reel", Octopart=https://octopart.com/c0603c471k5ractu-kemet-89311, RoHS=TRUE
C15: library part CMP-2007-03541-2, "Chip Multilayer Ceramic Capacitors for General Purpose, 0805, 10uF, X5R, 15%, 10%, 25V", Capacitance=10uF, Case Code (Imperial)=0805, Case Code (Metric)=2012, Dielectric=X5R, Max Operating Temperature=85°C, Min Operating Temperature=-55°C, Package Quantity=1, Tolerance=10%, Voltage=25V, Case/Package=0805, Depth=1.25mm, Height=1.25mm, Lead Free="Lead Free", Length=2mm, Material=Ceramic, Mount="Surface Mount", Packaging="Tape and Reel", Radiation Hardening=No, Termination=SMD/SMT, Thickness=0.053inch, Voltage Rating=25V, Voltage Rating (DC)=25V, Width=0.049inch
D1: library part CMP-1667-00004-1, "Fast Switching Diode, 75 V, 0.3 A, -65 to 150 degC, 2-Pin SOD323, RoHS, Tape and Reel", ComponentLink1Description="Manufacturer URL", ComponentLink1URL=http://www.diodes.com/, ComponentLink2Description=Datasheet, ComponentLink2URL=http://www.diodes.com/datasheets/ds30097.pdf, DatasheetVersion="Rev. 25-2, 03/2016", PackageDescription="2-Pin Small Outline Diode, Body 1.7 x 1.3 mm", PackageReference=SOD323-2
J1: library part CMP-0411-00002-1, "USB, MINI, SMD, RA KME04-USBMU03A01", Manufacturer=Molex, ComponentLink1Description="Manufacturer URL", ComponentLink1URL=http://www.molex.com/, ComponentLink2Description=Datasheet, ComponentLink2URL=http://www.molex.com/pdm_docs/sd/675031020_sd.pdf, DatasheetVersion="Rev F, 06/2009", Mounting Technology="Surface Mount", PackageDescription="Mini USB Connector, SMT, Righer Angle", PackageReference=67503-1020, PartNumber=67503-1020, Terminal Pitch="0.8 mm"
J2: library part CMP-17439-000250-1, "CONN HEADER VERT 4POS 2.5MM", Color=Natural, Contact Resistance=20mR, Current Rating=3A, Flammability Rating="UL94 V-0", Housing Color=White, Insulation Resistance=1GR, Max Operating Temperature=85°C, Max Voltage Rating (AC)=250V, Min Operating Temperature=-25°C, Package Quantity=500, Connector Type=Header, Contact Finish - Mating=TIN, Contact Material=Brass, Contact Plating=Tin, Contact Shape=Square, Contact Type="Male Pin", Depth=5.75mm, Fastening Type=Detent, Gender=Male, Housing Material=Polyamide, Insulation Color=Natural, Insulation Material=Nylon, Lead Free="Lead Free", Lead Pitch=2.5mm, Length=12.4mm, Mated Stacking Heights=9.8mm, Material=Polyamide, Max Current Rating=3A, Max Voltage Rating (DC)=250V, Mount="Through Hole", Number of Contacts=4, Number of Positions=4, Number of Rows=1, Orientation=Straight, Packaging=Bulk, Pitch=2.5mm, REACH SVHC="No SVHC", Series=XH, Termination=Solder, Voltage Rating=250V, Voltage Rating (AC)=250V, Wire/Cable Gauge=22AWG
J3: "Socket, DC supply, male, PIN: 2", Package=Package, Availability="Not in stock", Check_prices=https://www.snapeda.com/parts/XT60PW-M/AMASS/view-part/?ref=eda, MF=AMASS, MP=XT60PW-M, Price=None, SnapEDA_Link=https://www.snapeda.com/parts/XT60PW-M/AMASS/view-part/?ref=snap
J4 J5: library part CMP-15831-000105-1, "CONN HEADER VERT 2POS 2.54MM", Case/Package=SIL, Color=Black, Contact Resistance=25mR, Current=3A, Flammability Rating="UL94 V-0", Insulation Resistance=10GR, Max Operating Temperature=105°C, Min Operating Temperature=-40°C, Package Quantity=1000, Voltage=50V, Voltage Rating (AC)=750V, Connector Type="Male Pin", Contact Finish - Mating=GOLD, Contact Material=Brass, Contact Mating Length=0.24inch, Contact Plating=Gold, Contact Shape=Square, Contact Type="Male Pin", Current Rating=3A, Depth=2.54mm, Fastening Type=Pull, Gender=Male, Height=0.12inch, Housing Color=Black, Housing Material=Nylon, Insulation Color=Black, Insulation Material=Nylon, Lead Pitch=2.54mm, Length=5.08mm, Mated Stacking Heights=16.54mm, Mating Cycles=300, Max Current Rating=3A, Mount="Through Hole", Number of Contacts=2, Number of Poles=2, Number of Positions=2, Number of Rows=1, Orientation=Straight, Packaging=Bulk, Pitch=2.54mm, Radiation Hardening=No, Reach SVHC Compliant=Yes, Series=M20, Termination=Solder, Weight=0.25lb, Width=0.25inch, Working Voltage=750V
J6: "Socket DC Supply Connector Female", Package=Package, Availability="Not in stock", Check_prices=https://www.snapeda.com/parts/XT60PW-F/AMASS/view-part/?ref=eda, MF=AMASS, MP=XT60PW-F, Price=None, SnapEDA_Link=https://www.snapeda.com/parts/XT60PW-F/AMASS/view-part/?ref=snap
J?1: library part CMP-04776-000816-1, "2.54MM KK HDR VT FRICLK VRA .5AU", Color=Natural, Contact Resistance=10mR, Current Rating=4A, Flammability Rating="UL94 V-0", Housing Color=White, Insulation Resistance=50GR, Max Current Rating=7A, Max Operating Temperature=75°C, Max Voltage Rating (AC)=250V, Min Operating Temperature=0°C, Package Quantity=10, Connector Type="Male Pin", Contact Gender=Male, Contact Material=Brass, Contact Mating Length=0.295inch, Contact Plating=Gold, Contact Type="Male Pin", Depth=5.8mm, Fastening Type=Friction, Gender=Male, Glow Wire Compliant=Non-compliant, Halogen Free="Low Halogen", Height=14.73mm, Housing Material=Nylon, Lead Free="Lead Free", Length=12.7mm, Mount="Through Hole", Number of Circuits=5, Number of Contacts=5, Number of Lines=1, Number of Poles=5, Number of Positions=5, Number of Rows=1, Orientation=Straight, Packaging=Bulk, Pitch=2.54mm, Radiation Hardening=No, Series="KK® 6410", Termination=Solder, Voltage Rating=250V, Voltage Rating (DC)=250V
P1: library part CMP-1024-00357-1, "0.025\" SQ Post Header, Through-hole, Vertical, -55 to 125 degC, 2.54 mm Pitch, 4-Pin, Male, RoHS", Manufacturer=Samtec, Temperature Range="-55 to 125 degC", ComponentLink1Description="Manufacturer URL", ComponentLink1URL=http://www.samtec.com, ComponentLink2Description=Datasheet, ComponentLink2URL=http://www.samtec.com/documents/webfiles/pdf/TSW_TH.PDF, ComponentLink3Description="Package Specification", ComponentLink3URL=http://www.samtec.com/documents/webfiles/cpdf/TSW-XXX-XX-XXX-X-XX-XXX-MKT.pdf, DatasheetVersion=F-214, Mounting Technology=Through-hole, Orientation=Vertical, PackageDescription=".025[0.64] SQ. Post Terminal Strip Assembly", PackageReference=TSW-104-08-X-S, PackageVersion="DM, 8/1988", PartNumber=TSW-104-08-G-S, Pitch="2.54 mm", RoHS=True
P2: library part CMP-1502-01062-1, "THT Vertical Pin Header WR-PHD, Pitch 2.54 mm, Single Row, 3 pins", Contact Resistance=20mOhm, Manufacturer="Wurth Elektronik", Operating Temperature=-40to105degC, Rated Current=3A, Withstanding Voltage=500VAC, Working Voltage=250VAC, Datasheet URL=https://katalog.we-online.de/em/datasheet/6130xx11121.pdf, Gender=Male, Manufacturer URL=http://www.we-online.de, Mounting Technology=THT, Orientation=Vertical, Package Reference=61300311121, Packaging=Bag, Part Number=61300311121, Pin Number=3, Pitch=2.54mm, Publisher=WurthElektronik, Row Number=Single
P3: library part CMP-2000-05164-1, "Male Header, Pitch 2 mm, 1 x 3 Position, Height 6 mm, Tail Length 3.4 mm, -25 to 85 degC, RoHS, Bulk", Manufacturer=JST, Datasheet URL=https://datasheet.ciiva.com/11746/0900766b80826550-11746939.pdf, Datasheet Version=Oct-06, Manufacturer URL=http://www.jst.com/home2.html, No of Positions=3, Pitch=2mm, Style/Orientation=StraightHeader/Plug, Termination=Crimp, Type=ShroudedHeader
P4: library part CMP-1024-00365-1, "0.025\" SQ Post Header, Through-hole, Vertical, -55 to 125 degC, 2.54 mm Pitch, 5-Pin, Male, RoHS", Manufacturer=Samtec, Temperature Range="-55 to 125 degC", ComponentLink1Description="Manufacturer URL", ComponentLink1URL=http://www.samtec.com, ComponentLink2Description=Datasheet, ComponentLink2URL=http://www.samtec.com/documents/webfiles/pdf/TSW_TH.PDF, ComponentLink3Description="Package Specification", ComponentLink3URL=http://www.samtec.com/documents/webfiles/cpdf/TSW-XXX-XX-XXX-X-XX-XXX-MKT.pdf, DatasheetVersion=F-214, Mounting Technology=Through-hole, Orientation=Vertical, PackageDescription=".025[0.64] SQ. Post Terminal Strip Assembly", PackageReference=TSW-105-05-X-S, PackageVersion="DM, 8/1988", PartNumber=TSW-105-05-F-S, Pitch="2.54 mm", RoHS=True
P5: library part CMP-1024-00399-1, "0.025\" SQ Post Header, Through-hole, Vertical, -55 to 105 degC, 2.54 mm Pitch, 7-Pin, Male, RoHS", Manufacturer=Samtec, Temperature Range="-55 to 105 degC", ComponentLink1Description="Manufacturer URL", ComponentLink1URL=http://www.samtec.com, ComponentLink2Description=Datasheet, ComponentLink2URL=http://www.samtec.com/documents/webfiles/pdf/TSW_TH.PDF, ComponentLink3Description="Package Specification", ComponentLink3URL=http://www.samtec.com/documents/webfiles/cpdf/TSW-XXX-XX-XXX-X-XX-XXX-MKT.pdf, DatasheetVersion=F-214, Mounting Technology=Through-hole, Orientation=Vertical, PackageDescription=".025[0.64] SQ. Post Terminal Strip Assembly", PackageReference=TSW-107-05-X-S, PackageVersion="DM, 8/1988", PartNumber=TSW-107-05-T-S, Pitch="2.54 mm", RoHS=True
Q1 Q2 Q4 Q6 Q8: library part CMP-0434-00001-1, "N-channel 60 V, 1.8 Ohm, 0.35 A STripFET(TM) II Power MOSFET, SOT23", Manufacturer=STMicroelectronics, ComponentLink1Description="Manufacturer URL", ComponentLink1URL=http://www.st.com/, ComponentLink2Description=Datasheet, ComponentLink2URL=http://www.st.com/st-web-ui/static/active/en/resource/technical/document/datasheet/CD00005134.pdf, DatasheetVersion="Rev. 9, 11/2008", Mounting Technology="Surface Mount", PackageDescription="3-Pin SOT23, 3.016 x 2.8 mm Body, 0.95 mm Pitch", PackageReference=SOT-23, PartNumber=2N7002
Q3 Q7: library part CMP-83955-000014-1, "MOSFET N-CH 30V 27A/60A 8DFN", Case/Package=DFN, Continuous Drain Current (ID)=60A, Drain to Source Voltage (Vdss)=30V, Input Capacitance=820pF, Max Operating Temperature=150°C, Max Power Dissipation=6.2W, Min Operating Temperature=-55°C, Mount="Surface Mount", Packaging="Tape and Reel", Rds On Max=5.2mR, RoHS Compliant=Yes
Q5: library part CMP-2000-06251-1, "P-Channel Specified Power Trench(R) MOSFET, 2.5 V, -20 V, -1.6 A, -55 to 150 degC, 3-Pin SOT23, RoHS, Tape and Reel", Current - Continuous Drain (Id) @ 25°C=1.6A(Ta), Drain to Source Voltage (Vdss)=20V, Input Capacitance (Ciss) @ Vds=451pF@10V, Manufacturer="Fairchild Semiconductor", Package / Case=TO-236-3,SC-59,SOT-23-3, Package Description="3-Pin Small Outline Transistor, Body 2.92 x 1.4 mm, Pitch 0.95 mm", Package Reference=SSOT3L, Package Version="Rev. 3, 05/2015", Power - Max=460mW, Standard Package=3,000, Supplier Device Package=3-SSOT, Category=DiscreteSemiconductorProducts, Datasheet URL=https://datasheet.ciiva.com/22655/1802191-22655335.pdf, Datasheet Version="Rev. F1(W), 11/2013", Family=FETs-Single, FET Feature=Standard, FET Type=MOSFETP-Channel,MetalOxide, Gate Charge (Qg) @ Vgs=6.2nC@4.5V, Manufacturer URL=https://www.fairchildsemi.com/, Mounting Technology=SurfaceMount, Mounting Type=SurfaceMount, Online Catalog=P-ChannelLogicLevelGateFETs, Other Names=FDN338PTR, Package URL=https://www.fairchildsemi.com/package-drawings/MA/MA03B.pdf, Packaging=Tape&Reel(TR), PCN Design/Specification=MoldCompound08/April/2008, PCN Packaging=BinaryYearCodeMarking15/Jan/2014, Product Training Modules=HighVoltageSwitchesforPowerProcessingSMPSPowerSwitch, Rds On (Max) @ Id, Vgs=115mOhm@1.6A,4.5V, Series=PowerTrench®, Vgs(th) (Max) @ Id=1.5V@250µA
R1 R8 R10 R11 R14 R15 R17 R18 R19 R20 R23 R25: library part CMP-2000-03838-2, "RES Thick Film, 10kΩ, 5%, 0.1W, 200ppm/°C, 0603", Case Code (Imperial)=0603, Case Code (Metric)=1608, Max Operating Temperature=155°C, Max Power Dissipation=100mW, Min Operating Temperature=-55°C, Package Quantity=1, Resistance=10kR, Temperature Coefficient=200ppm/°C, Tolerance=5%, Voltage Rating=75V, Case/Package=0603, Composition="Thick Film", Contact Plating=Tin, Depth=0.85mm, Features="Automotive AEC-Q200", Height=0.02inch, Lead Free="Lead Free", Length=1.55mm, Military Standard=Not, Mount="Surface Mount", Number of Pins=2, Number of Terminations=2, Packaging="Tape and Reel", Power Rating=100mW, Radiation Hardening=No, Termination=SMD/SMT, Voltage Rating (DC)=75V, Weight=7.1E-05oz, Width=0.033inch
R2 R4 R5 R6 R7 R9: library part CMP-2000-03825-2, "RES Thick Film, 100Ω, 1%, 0.1W, 100ppm/°C, 0603", Case Code (Imperial)=0603, Case Code (Metric)=1608, Max Operating Temperature=155°C, Max Power Dissipation=100mW, Min Operating Temperature=-55°C, Package Quantity=10000, Resistance=100R, Temperature Coefficient=100ppm/°C, Tolerance=1%, Voltage Rating=75V, Case/Package=0603, Composition="Thick Film", Contact Plating=Tin, Depth=0.85mm, Features="Automotive AEC-Q200", Height=0.02inch, Lead Free="Lead Free", Length=1.55mm, Military Standard=Not, Number of Terminations=2, Packaging="Tape and Reel", Power Rating=100mW, Radiation Hardening=No, Termination=SMD/SMT, Voltage Rating (DC)=75V, Weight=7.1E-05oz, Width=0.033inch
R3: library part CMP-07231-006697-1, "RES 0.005 OHM 1% 3W 2512", Case Code (Imperial)=2512, Case Code (Metric)=6432, Max Operating Temperature=170°C, Max Power Dissipation=3W, Min Operating Temperature=-55°C, Resistance=5mR, Resistor Type="Metal Film", Temperature Coefficient=75ppm/°C, Tolerance=1%, Case/Package=2512, Contact Plating=Tin, Depth=3.35mm, Features="Moisture Resistant", Height=0.035inch, Length=0.254inch, Mount="Surface Mount", Number of Terminations=2, Packaging="Cut Tape", Power Rating=3W, REACH SVHC="No SVHC", Termination=Solder, Width=0.132inch
R12: library part CMP-2001-03987-2, "RES Thick Film, 510kΩ, 1%, 0.125W, 100ppm/°C, 0805", Case Code (Imperial)=0805, Case Code (Metric)=2012, Max Operating Temperature=155°C, Max Power Dissipation=125mW, Min Operating Temperature=-55°C, Package Quantity=10, Resistance=510kR, Temperature Coefficient=100ppm/°C, Tolerance=1%, Voltage Rating=150V, Case/Package=0805, Composition="Thick Film", Contact Plating=Tin, Depth=1.25mm, Features="Automotive AEC-Q200", Height=0.45mm, Lead Free="Lead Free", Length=2mm, Military Standard=Not, Mount="Surface Mount", Number of Pins=2, Number of Terminations=2, Packaging="Tape and Reel", Power Rating=125mW, Radiation Hardening=No, Termination=SMD/SMT, Voltage Rating (DC)=150V, Weight=0.000194oz, Width=1.25mm
R13: library part CMP-1666-00003-5, "RES Thick Film, 1kΩ, 1%, 0.1W, 100ppm/°C, 0603", Case Code (Imperial)=0603, Case Code (Metric)=1608, Max Operating Temperature=155°C, Max Power Dissipation=100mW, Min Operating Temperature=-55°C, Package Quantity=10, Resistance=1kR, Temperature Coefficient=100ppm/°C, Tolerance=1%, Voltage Rating=75V, Case/Package=0603, Composition="Thick Film", Contact Plating=Tin, Depth=0.85mm, Features="Automotive AEC-Q200", Height=0.45mm, Lead Free="Lead Free", Length=1.55mm, Military Standard=Not, Mount="Surface Mount", Number of Pins=2, Number of Terminations=2, Packaging="Tape and Reel", Power Rating=100mW, Radiation Hardening=No, Termination=SMD/SMT, Voltage Rating (DC)=75V, Weight=7.1E-05oz, Width=0.033inch
R16 R22 R24: library part CMP-2000-03013-2, "RES Thick Film, 1MΩ, 1%, 0.1W, 100ppm/°C, 0603", Case Code (Imperial)=0603, Case Code (Metric)=1608, Max Operating Temperature=155°C, Max Power Dissipation=100mW, Min Operating Temperature=-55°C, Package Quantity=10, Resistance=1MR, Temperature Coefficient=100ppm/°C, Tolerance=1%, Voltage Rating=75V, Case/Package=0603, Composition="Thick Film", Contact Plating=Tin, Depth=0.85mm, Features="Automotive AEC-Q200", Height=0.45mm, Lead Free="Lead Free", Length=1.55mm, Military Standard=Not, Mount="Surface Mount", Number of Pins=2, Number of Terminations=2, Packaging="Tape and Reel", Power Rating=100mW, Radiation Hardening=No, Termination=SMD/SMT, Voltage Rating (DC)=75V, Weight=7.1E-05oz, Width=0.85mm
R21: library part NTCLE100E3104JB0, "Thermistor NTC 100K Ohm 5% 2-Pin Radial 4190K -5 to -4.5 Bulk", Case/Package=Radial, Manufacturer="Vishay BCcomponents", Max Operating Temperature=125°C, Max Power Dissipation=500mW, Min Operating Temperature=-40°C, Package Quantity=500, Resistance=100kR, Resistance Tolerance=5%, Supplier Part Number 1=594-2381-640-63104, Accuracy=1.5%, Category=Thermistors, ComponentLink1Description=https://datasheet.ciiva.com/15097/getdatasheetpartid-129697-15097699.pdf?src-supplier=Verical, ComponentLink1URL=https://datasheet.ciiva.com/15097/getdatasheetpartid-129697-15097699.pdf?src-supplier=Verical, ComponentLink2Description=https://datasheet.ciiva.com/7659/1784420-7659488.pdf?src-supplier=Element14, ComponentLink2URL=https://datasheet.ciiva.com/7659/1784420-7659488.pdf?src-supplier=Element14, ComponentLink3Description=https://datasheet.ciiva.com/2851/ntcle100-2851268.pdf?src-supplier=Digi-Key, ComponentLink3URL=https://datasheet.ciiva.com/2851/ntcle100-2851268.pdf?src-supplier=Digi-Key, ComponentLink4Description=https://datasheet.ciiva.com/2848/ntcle100-2848931.pdf?src-supplier=Digi-Key, ComponentLink4URL=https://datasheet.ciiva.com/2848/ntcle100-2848931.pdf?src-supplier=Digi-Key, ComponentLink5Description=https://datasheet.ciiva.com/3280/ntcle100-3280361.pdf?src-supplier=Avnet, ComponentLink5URL=https://datasheet.ciiva.com/3280/ntcle100-3280361.pdf?src-supplier=Avnet, ComponentLink6Description=https://datasheet.ciiva.com/2851/ntcle100-2851261.pdf?src-supplier=Digi-Key, ComponentLink6URL=https://datasheet.ciiva.com/2851/ntcle100-2851261.pdf?src-supplier=Digi-Key, Depth=3mm, Height=9mm, Lead Diameter=0.6mm, Lead Free="Lead Free", Lead Length=17mm, Lead Pitch=2.54mm, Length=3.3mm, Manufacturer Part Number=NTCLE100E3104JB0, Mount="Through Hole", Number of Pins=2, Packaging=Bulk, Pricing 1="1=0,89000, 10=0,73400, 50=0,73400, 100=0,45600, 1000=0,34600, 10000=0,28400 (USD)", Radiation Hardening=No, RoHS=Yes, RoHS Compliant=Yes, Series=2322, Stock 1=20929, Supplier 1=Mouser, Termination=Radial, Tolerance=5%
U1: "Bluetooth, WiFi 802.11b/g/n, Bluetooth v5.0 Transceiver Module 2.4GHz PCB Trace Surface Mount", Package=None, Availability="In Stock", Check_prices=https://www.snapeda.com/parts/ESP32-S3-WROOM-1-N16R2/Espressif+Systems/view-part/?ref=eda, MF="Espressif Systems", MP=ESP32-S3-WROOM-1-N16R2, Price=None, Purchase-URL=https://pricing.snapeda.com/search/part/ESP32-S3-WROOM-1-N16R2/?ref=eda, SnapEDA_Link=https://www.snapeda.com/parts/ESP32-S3-WROOM-1-N16R2/Espressif+Systems/view-part/?ref=snap
U2: library part CMP-04911-000072-1, "IC BATT MON MULTI 3-5C 20TSSOP", Case/Package=TSSOP, Max Operating Temperature=85°C, Min Operating Temperature=-40°C, Operating Supply Voltage=25V, Output Voltage=3.6V, Package Quantity=2000, Contact Plating=Gold, Fault Protection="Over Current", Interface=I2C, Lead Free="Lead Free", Mount="Surface Mount", Number of Pins=20, Packaging="Tape and Reel", RoHS Compliant=Yes, Weight=0.002758oz
U3: library part CMP-12756-000010-1, "IC REG LINEAR 3.3V 150MA SOT23-5", Dropout Voltage=165mV, Manufacturer="Diodes Inc.", Max Junction Temp=+125°C, Max Supply Voltage=13.2V, Min Supply Voltage=2.5V, Nominal Supply Current=95-1300uA, Output Current=150mA, Output Voltage=3.3V, Package=SOT25, Temperature="-40°C to +125°C", Temperature Range Low=-40°C, Accuracy Percentage=1%, Automotive=No, Category=IC, ComponentLink2Description=Datasheet, ComponentLink2URL=https://www.diodes.com/assets/Datasheets/AP2202.pdf, Device Class L1="Integrated Circuits (ICs)", Device Class L2="Power Management ICs", Device Class L3="Voltage Regulators - Linear", Digikey Description="IC REG LINEAR 3.3V 150MA SOT23-5", Footprint Url=https://www.diodes.com/assets/Package-Files/SOT25.pdf, Height=1.4mm, Ipc Land Pattern Name=SOT95P280X115-5, Lead Free=Yes, Manufacturer Part Number=AP2202K-3.3TRG1, Mouser Description="LDO Voltage Regulators 150mA CMOS LDO 3.3V", Number Of Outputs=1, Octopart=https://octopart.com/ap2202k-3.3trg1-diodes+inc.-30954618, Output Type=Fixed, RoHS=TRUE, Standoff Height=0.013mm, Temperature Range High=+125°C

## Free pads (board coordinates)
  round 4 hole 3: 2(4,4) 2(4,61) 2(46,4) 2(46,61)
  round 0.025 smd far side: 3(16.123,12.424) 3(24.327,16.202) 3(25.179,8.856) 3(33.958,16.129) 3(38.5,8.884)
  round 1.524 hole 0.762: 4(29.928,3.848) 5(37.131,3.848)

## Via types
v1: diameter 0.6, hole 0.3, Top Layer to Bottom Layer, 156 vias

## Nets (pads, with @x,y where several pads share a name; then routed paths per layer and width w, separated by ;. In a path a pad name is that pad's centre, name@x,y a point inside that pad or via, vN(x,y) a via of type N, cw(c..) or ccw(c..) an arc to the next point about the centre after c; other vN are vias at no path point)
D_N: J1.2 U1.13 | length 17
  Top Layer w0.381: J1.2 7.375,27.194 8.644,27.194 8.667,27.171 9.439,27.171 17.022,34.754 17.022,37.951 16.964,38.009 16.964,38.475 U1.13
D_P: J1.3 U1.14 | length 18
  Top Layer w0.381: J1.3 7.375,26.513 8.644,26.513 8.667,26.536 9.702,26.536 17.657,34.491 17.657,37.951 17.715,38.009 17.715,38.475 U1.14
GND: C1.2 C2.2 C3.2 C4.2 C5.1 C6.2 C7.2 C11.1 C12.2 C13.2 C14.2 C15.2 C16.2 C17.2 C18.2 C19.2 C20.2 C21.2 C22.2 J1.5 J2.1 J3.1 J4.2 J5.2 J?1.5 P1.4 P3.3 P4.5 P5.7 pad.3@16.123,12.424 Q5.1 R3.1 R6.1 R7.1 R12.1 R21.1 U1.1 U1.40 U1.41_1 U1.41_2 U1.41_3 U1.41_4 U1.41_5 U1.41_6 U1.41_7 U1.41_8 U1.41_9 U2.3 U3.2 | length 11.2
  Top Layer w0.254: U1.41_7 U1.41_2 ; U1.41_8 U1.41_1 ; U1.41_9 U1.41_3 ; U1.41_4 U1.41_2 ; U1.41_5 U1.41_1 ; U1.41_6 U1.41_3 ; U1.41_2 U1.41_1 ; U1.41_1 U1.41_3
  other v1: 13.886,2.704 16.886,2.703 19.886,2.703 12.495,6.507 13.891,6.524 11.375,6.598 15.164,6.952 10.302,7.161 10.302,8.357 15.63,8.357 43.792,8.684 49.229,8.684 46.505,8.705 10.302,9.555 15.63,9.555 10.302,10.73 15.63,10.73 14.843,11.5 11.274,11.574 12.469,11.574 13.667,11.574 15.24,12.635 13.86,13.141 43.792,13.372 46.505,13.372 49.229,13.372 12.363,13.79 15.558,13.79 19.203,14.102 10.877,14.373 16.687,14.651 14.632,15.21 19.203,15.31 16.687,15.846 13.598,16.337 19.203,16.732 16.687,17.044 12.618,17.388 19.203,17.906 16.609,18.332 17.934,18.332 43.837,18.542 46.505,18.542 49.229,18.542 27.221,20.695 45.312,21.693 16.22,21.831 18.911,22.179 17.416,22.396 30.14,23.834 36.878,24.978 45.363,25.641 27.138,27.496 40.423,28.856 28.398,29.563 35.199,30.683 33.469,34.291 1.464,41 6.579,44.584 6.579,47.384 7.784,48.499 10.6,48.524
NetC1_1: C1.1 C2.1 J1.1 P1.1 P2.2 Q1.1 Q2.1 Q4.1 Q6.1 Q8.1 R1.1 R11.2 R15.2 R20.2 R23.2 R25.2 U1.2 | length 105.5
  Top Layer w0.254: U1.2 U1.2@2.746,38.734 ; Q1.1 22.146,50.679 22.146,49.906 24.121,47.931 24.536,47.931 ; 24.536,39.38 24.536,47.931 ; Q2.1 25.921,50.654 25.921,50.088 26.293,49.716 26.293,49.122 R11.2 26.585,49.137 29.448,49.137 R15.2 ; R11.2@26.429,48.981 26.429,48.08 26.28,47.931 24.536,47.931 ; R15.2@29.547,49.245 29.758,49.456 30.822,49.456 31.145,49.779 Q4.1 ; Q4.1@31.145,49.771 31.976,48.94 34.398,48.94 R20.2 34.696,48.766 35.387,49.457 35.387,49.544 36.388,50.545 Q6.1 37.5,52.304 38.021,52.824 38.021,53.302 38.145,53.427 R23.2@38.279,53.427 ; Q8.1 38.018,56.394 39.156,56.394 39.293,56.394 39.369,56.394 R25.2@39.489,56.394 ; R23.2@38.279,53.431 38.4,53.431 39.369,54.401 39.369,56.273 R25.2@39.489,56.394 ; R25.2@39.156,56.261 R25.2@39.357,56.261 ; R25.2@39.156,56.279 R25.2@39.18,56.304 ; R25.2@39.156,56.304 R25.2@39.18,56.304 ; R25.2@39.226,56.349 R25.2@39.18,56.304 ; R25.2@39.293,56.304 R25.2@39.18,56.304 ; R25.2@39.293,56.402 39.359,56.469 R25.2 R25.2@39.489,56.394
  Top Layer w0.5: C1.1 1.341,36.541 2.968,36.541 C2.1 2.995,36.503 2.87,36.628 2.87,38.481 2.934,38.546 U1.2@2.746,38.734 ; C2.1@3.202,36.388 3.891,36.388 4.835,35.445 R1.1@5.085,35.445 ; R1.1@5.074,35.455 R1.1 4.968,35.455 5.093,35.33 5.093,34.664 6.021,33.735 8.318,33.735 9.146,32.908 9.854,32.199 9.854,29.008 8.9,28.054 J1.1
  Top Layer w0.6: U1.2@2.746,38.734 v1(2.746,41)
  Top Layer w1: P1.1 24.536,39.764 28.275,36.025 34.035,36.025 36.44,33.621 42.461,33.621 42.886,33.196 P2.2
  Bottom Layer w0.6: v1(2.746,41) 3.746,42 20.243,42 22.004,40.239 22.388,40.239 P1.1
NetC3_1: C3.1 C4.1 J5.1 R1.2 U1.3 | length 8.9
  Top Layer w0.254: U1.3 4.035,38.703 4.035,37.752 4.576,37.211 4.576,37.203 4.824,36.955 R1.2 5.008,36.897 6.51,36.897 C3.1 6.643,36.913 8.329,36.913 C4.1 8.535,36.708 9.203,36.708 9.759,36.152 J5.1
NetC5_2: C5.2 C8.1 R2.2 R18.2 U2.16 | length 17.6
  Top Layer w0.254: R2.2 17.014,29.563 19.386,29.563 C5.2 19.515,29.501 20.192,29.501 20.788,28.905 21.336,28.905 21.618,28.623 22.286,28.623 23.006,27.903 U2.16 24.532,27.879 25.37,27.879 v1(26.836,26.413) ; v1(31.891,26.38) 32.29,25.981 32.758,25.981 R18.2
  Bottom Layer w0.254: v1(26.836,26.413) 26.868,26.381 31.89,26.381 v1(31.891,26.38)
NetC6_1: C6.1 C10.2 R7.2 U2.18 | length 10.7
  Top Layer w0.254: R7.2 19.005,20.575 19.053,20.575 19.292,20.336 20.578,20.336 21.518,21.276 21.518,21.769 21.776,22.026 21.776,23.623 C10.2 21.836,24.822 22.486,25.472 22.486,26.141 22.924,26.579 U2.18@24.507,26.579
NetC7_1: C7.1 R6.2 U2.17 | length 4.8
  Top Layer w0.254: R6.2 20.339,27.217 21.233,27.217 21.329,27.121 C7.1 ; C7.1@21.441,27.233 21.451,27.243 22.614,27.243 22.624,27.253 U2.17
NetC8_2: C8.2 C9.1 R5.2 U2.15 | length 8.1
  Top Layer w0.254: C9.1@21.418,31.318 21.418,31.585 C9.1 ; C8.2@21.452,30.4 21.452,31.318 C9.1 ; U2.15 23.49,28.553 22.102,29.941 21.55,29.941 C8.2 ; R5.2 R5.2@20.092,31.453 ; R5.2 R5.2@20.092,31.453 ; R5.2 R5.2@20.092,31.453 ; R5.2@20.092,31.453 21.287,31.453 C9.1 ; C8.2 21.445,30.364 C8.2
NetC9_2: C9.2 R4.2 U2.12 U2.13 U2.14 | length 7.6
  Top Layer w0.254: R4.2 19.8,32.868 21.502,32.868 21.684,32.687 22.101,32.687 22.662,32.126 22.662,31.14 23.299,30.503 U2.12 U2.13 U2.14
NetC10_1: C10.1 C11.2 R9.2 U2.19 | length 6.9
  Top Layer w0.254: R9.2 22.95,20.695 22.95,21.013 23.028,21.092 23.028,21.094 23.155,21.221 23.155,22.022 C11.2@23.16,22.027 ; C10.1 22.994,23.774 22.994,25.78 23.143,25.929 24.483,25.929 U2.19 ; C10.1@23.184,23.523 23.184,22.129 C11.2
NetC12_1: C12.1 C14.1 J2.4 R4.1 R13.1 U2.9 | length 40.4
  Top Layer w0.35: J2.4 7.509,17.365 15.312,25.167 15.312,31.054 17.136,32.879 17.934,32.879 18.196,33.141 18.388,33.141 18.463,33.216 18.463,33.699 18.668,33.904 21.991,33.904 23.06,32.835 C12.1@25.177,32.835 ; C12.1 25.196,32.816 26.703,32.816 C14.1 27.221,32.802 ; 27.221,32.783 R13.1@28.195,32.783 ; R13.1 R13.1@28.195,32.783 ; U2.9 29.081,30.503 28.195,31.39 R13.1@28.195,32.783
NetC13_1: C13.1 R12.2 U1.30 U2.20 | length 41.6
  Top Layer w0.254: U1.30 14.487,55.911 14.487,54.198 16.227,52.458 16.227,41.133 v1(16.22,41.127) ; U2.20 24.518,25.313 26.082,25.313 v1(26.092,25.324) 26.092,23.722 R12.2 25.986,23.72 25.884,23.619 26.259,23.244 C13.1@26.259,22.314 ; C13.1@26.259,22.314 C13.1 ; C13.1@26.259,22.314 C13.1 ; C13.1@26.259,22.314 C13.1 ; C13.1@26.259,22.314 C13.1
  Bottom Layer w0.254: v1(16.22,41.127) 16.22,38.727 26.117,28.83 26.117,25.348 v1(26.092,25.324)
NetC15_1: C15.1 C16.1 R13.2 U2.10 | length 6.2
  Top Layer w0.254: R13.2 28.339,34.264 28.587,34.016 28.587,33.891 29.386,33.091 29.956,33.091 C15.1 ; U2.10 30.268,31.153 30.327,31.211 30.327,32.72 C15.1 ; C16.1 30.344,32.861 C15.1
NetC17_1: C17.1 P2.1 U2.8 | length 16.3
  Top Layer w0.35: U2.8@30.786,29.853 31.11,29.853 31.857,30.6 31.896,30.6 32.385,31.089 C17.1 32.874,31.617 32.874,31.938 33.222,32.286 v1(39.704,32.285)
  Bottom Layer w0.4: v1(39.704,32.285) 39.704,34.015 41.858,36.169 42.615,36.169 P2.1
NetC18_1: C18.1 U2.7 | length 2.2
  Top Layer w0.254: U2.7 32.181,29.203 C18.1
NetC19_1: C19.1 R18.1 R21.2 U2.6 | length 8.4
  Top Layer w0.254: U2.6 30.183,28.529 30.978,28.529 32.207,27.299 R18.1 ; R18.1 C19.1@35.449,27.299 ; C19.1 35.6,28.554 R21.2
NetC20_1: C20.1 P2.3 U3.5 | length 5.6
  Top Layer w0.5: U3.5 C20.1@42.098,27.279
  Top Layer w0.6: C20.1@42.098,27.279 C20.1 42.03,29.875 42.811,30.656 P2.3
NetC21_1: C21.1 J3.2 J6.1 J6.S2 pad.3@25.179,8.856 pad.4 U3.1 U3.3 | length 40.7
  Top Layer w0.254: J3.2@20.652,8.38 J3.2
  Top Layer w0.5: C21.1 42.067,21.767 42.098,21.798 U3.1 42.123,23.291 42.123,23.729 42.565,24.17 43.603,24.17 43.973,23.8 43.973,23.166 U3.3@43.998,23.141
  Top Layer w0.6: pad.4@29.931,4 31.447,2.484 40.143,2.484 J6.S2@40.281,2.623 ; J6.S2 40.281,3.523 42.067,5.309 C21.1
  Bottom Layer w1: pad.4@29.931,4 J6.1